# EAGLE board GPIO_Block-Panel-v10 (EAGLE 6.6.0), part 1 of 3
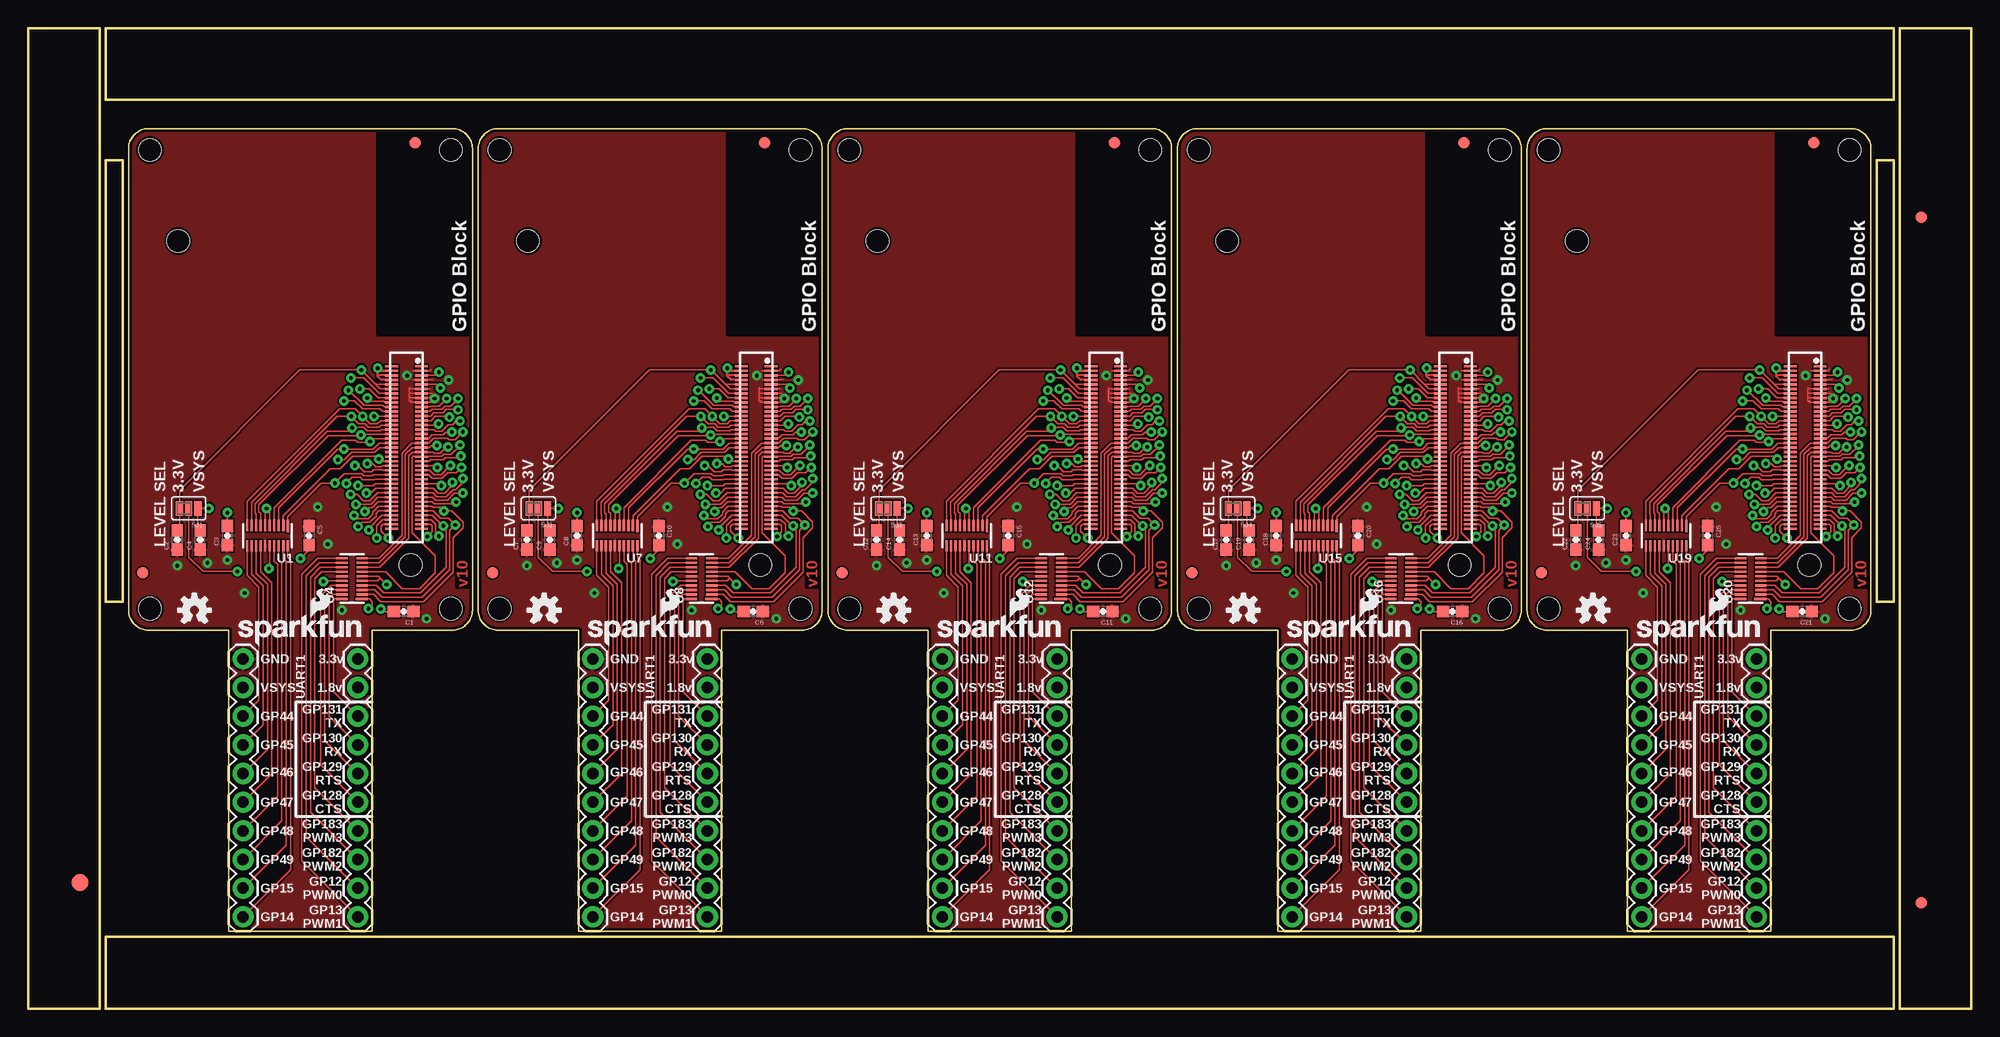
[diagram p0: board, top side]
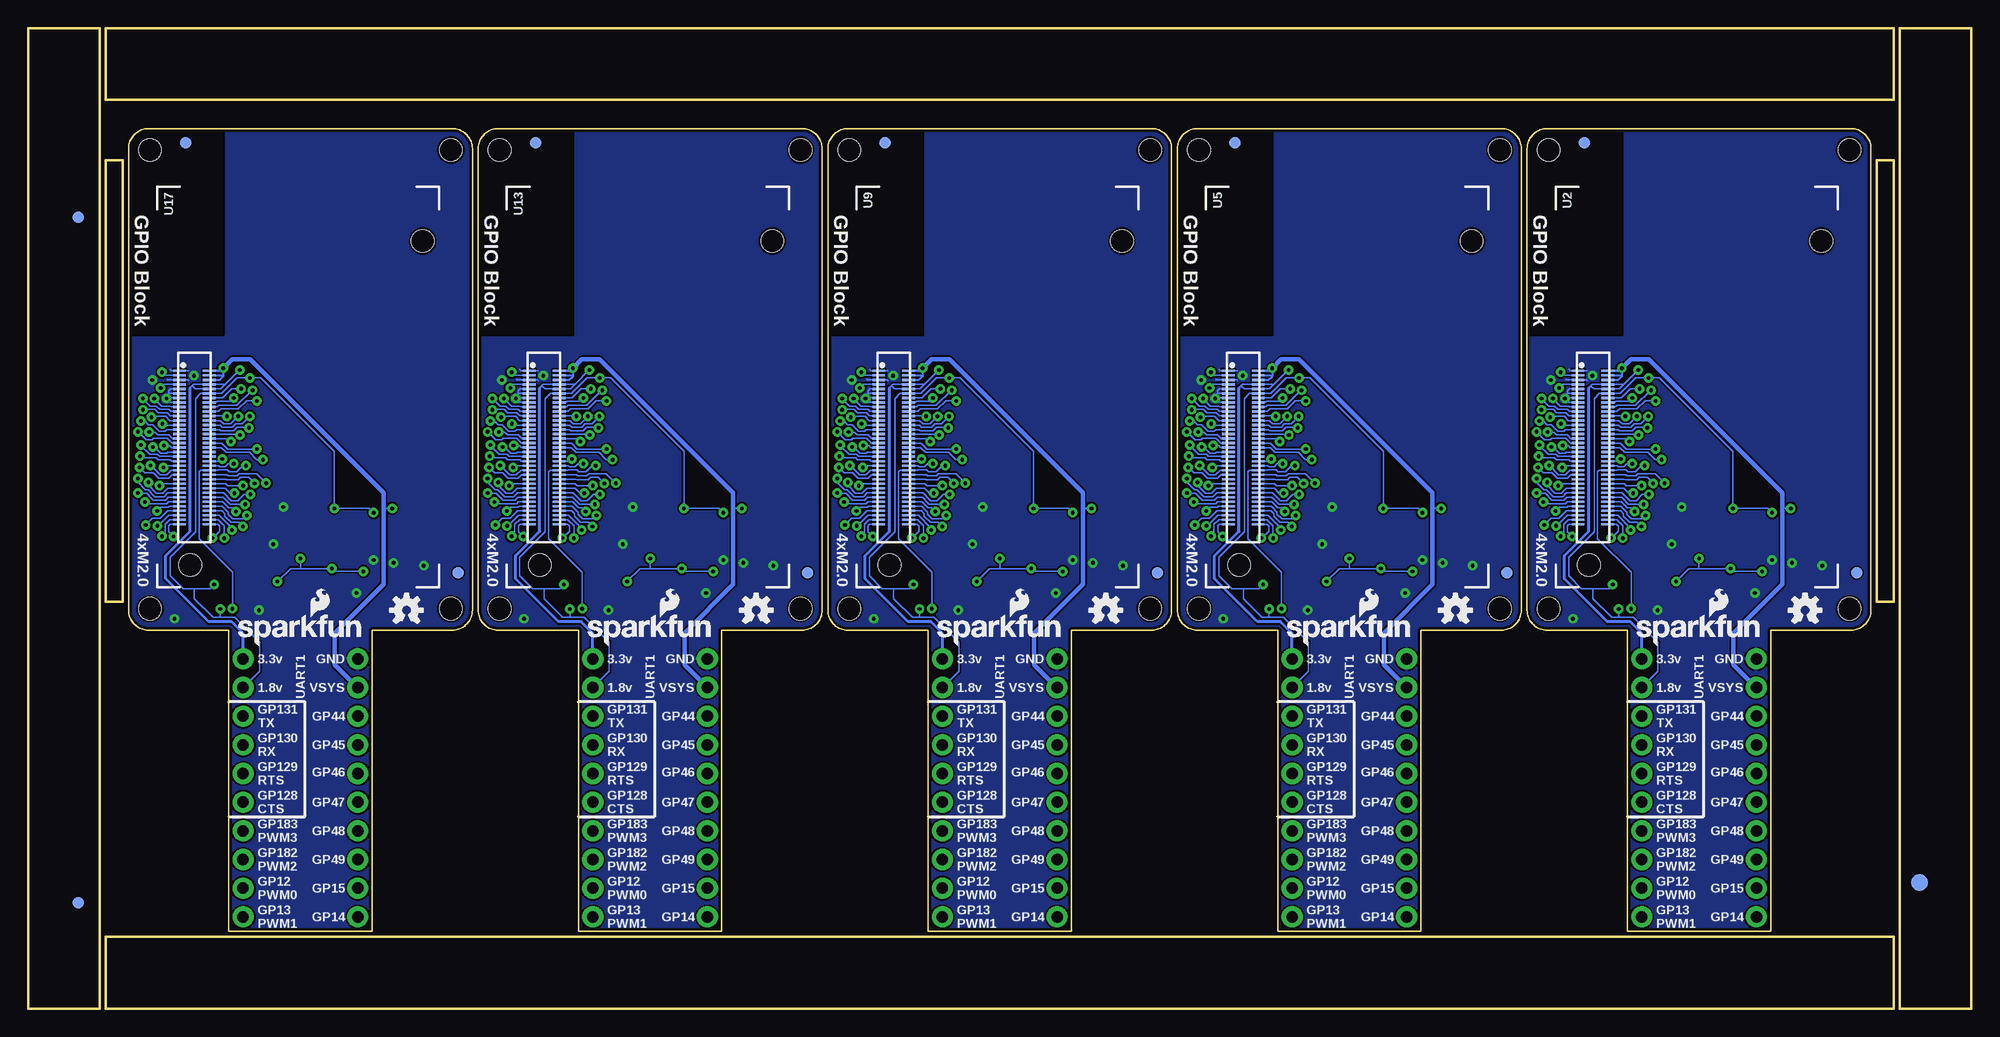
[diagram p1: board, bottom side, seen from below]

Size 172.21 x 86.87 mm. Coordinates in mm from the lower left corner, seen from the top.
Outline: 6.35,79.25 6.35,0 0,0 0,29.72
Outline: 172.21,75.44 172.21,0 165.86,0 165.86,25.91
Outline: 165.86,5.33 165.86,86.87 172.21,86.87 172.21,54.86
Outline: 0,14.48 0,86.87 6.35,86.87 6.35,64.01
Outline: 39.37,76.2 39.37,35.31 arc-90 37.59,33.53 30.48,33.53 30.48,6.86 17.78,6.86 17.78,33.53 10.67,33.53 arc-90 8.89,35.31 8.89,76.2 arc-90 10.67,77.98 37.59,77.98 arc-90 39.37,76.2
Outline: 70.36,76.2 70.36,35.31 arc-90 68.58,33.53 61.47,33.53 61.47,6.86 48.77,6.86 48.77,33.53 41.66,33.53 arc-90 39.88,35.31 39.88,76.2 arc-90 41.66,77.98 68.58,77.98 arc-90 70.36,76.2
Outline: 101.35,76.2 101.35,35.31 arc-90 99.57,33.53 92.46,33.53 92.46,6.86 79.76,6.86 79.76,33.53 72.64,33.53 arc-90 70.87,35.31 70.87,76.2 arc-90 72.64,77.98 99.57,77.98 arc-90 101.35,76.2
Outline: 132.33,76.2 132.33,35.31 arc-90 130.56,33.53 123.44,33.53 123.44,6.86 110.74,6.86 110.74,33.53 103.63,33.53 arc-90 101.85,35.31 101.85,76.2 arc-90 103.63,77.98 130.56,77.98 arc-90 132.33,76.2
Outline: 163.32,76.2 163.32,35.31 arc-90 161.54,33.53 154.43,33.53 154.43,6.86 141.73,6.86 141.73,33.53 134.62,33.53 arc-90 132.84,35.31 132.84,76.2 arc-90 134.62,77.98 161.54,77.98 arc-90 163.32,76.2
Outline: 6.86,6.35 6.86,0 165.35,0 165.35,6.35 6.86,6.35
Outline: 6.86,80.52 165.35,80.52 165.35,86.87 6.86,86.87 6.86,80.52
Outline: 6.86,36.07 6.86,75.18 8.38,75.18 8.38,36.07 6.86,36.07
Outline: 163.83,36.07 163.83,75.18 165.35,75.18 165.35,36.07 163.83,36.07
Copper layers (1*16): Top 0.035mm / dielectric 1.5mm / Bottom 0.035mm
Design rules "SparkFun-2-layer *": minimum track width 6mil, minimum drill 13mil, track to track 6mil, track to pad 6mil, pad to pad 6mil, via to via 6mil, smd to smd 6mil, copper to edge 8mil, drill to drill 8mil, minimum pad ring 12mil, minimum via ring 10mil, stop-mask expansion 4mil, vias tented up to drill 20mil, thermal gap 6mil
Holes 2 mm at 37.47,35.43 10.79,35.43 10.79,76.07 37.47,76.07 68.45,35.43 41.78,35.43 41.78,76.07 68.45,76.07 99.44,35.43 72.77,35.43 72.77,76.07 99.44,76.07 130.43,35.43 103.76,35.43 103.76,76.07 130.43,76.07 161.42,35.43 134.75,35.43 134.75,76.07 161.42,76.07
tRestrict: area 31,59.7 to 39.4,78; area 62,59.7 to 70.4,78; area 93,59.7 to 101.3,78; area 124,59.7 to 132.3,78; area 154.9,59.7 to 163.3,78
bRestrict: area 31,59.7 to 39.4,78; area 62,59.7 to 70.4,78; area 93,59.7 to 101.3,78; area 124,59.7 to 132.3,78; area 154.9,59.7 to 163.3,78

## Footprints (pad centres in the part's own frame; a part is rotated, then mirrored left to right if it is on the bottom)
0603-CAP = smd 1.1 x 1: 1 -0.85,0; 2 0.85,0
FIDUCIAL-1.5X3 = smd 1.5 x 1.5: 1 0,0
FIDUCIAL-1X2 = smd 1 x 1: 1 0,0
1X10 = drill 1.016 pad 1.88: 1 0,0; 2 2.54,0; 3 5.08,0; 4 7.62,0; 5 10.16,0; 6 12.7,0; 7 15.24,0; 8 17.78,0; 9 20.32,0; 10 22.86,0
PAD-JUMPER-3-2OF3_NC_BY_PASTE_YES_SILK_FULL_BOX = smd 0.635 x 1.27: 1 -0.813,0; 2 0,0; 3 0.813,0
UFDFN-20 = smd 0.2 x 1.1: 1 -1.8,-0.85 | smd 0.2 x 1: 2 -1.4,-0.9; 3 -1,-0.9; 4 -0.6,-0.9; 5 -0.2,-0.9; 6 0.2,-0.9; 7 0.6,-0.9; 8 1,-0.9; 9 1.4,-0.9; 10 1.8,-0.9; 11 1.8,0.9; 12 1.4,0.9; 13 1,0.9; 14 0.6,0.9; 15 0.2,0.9; 16 -0.2,0.9; 17 -0.6,0.9; 18 -1,0.9; 19 -1.4,0.9; 20 -1.8,0.9
EDISON_DAUGHTER = smd 1.14 x 0.2: 1 1.98,19.17; 2 4.62,19.17; 3 1.98,18.77; 4 4.62,18.77; 5 1.98,18.37; 6 4.62,18.37; 7 1.98,17.97; 8 4.62,17.97; 9 1.98,17.57; 10 4.62,17.57; 11 1.98,17.17; 12 4.62,17.17; 13 1.98,16.77; 14 4.62,16.77; 15 1.98,16.37; 16 4.62,16.37; 17 1.98,15.97; 18 4.62,15.97; 19 1.98,15.57; 20 4.62,15.57; 21 1.98,15.17; 22 4.62,15.17; 23 1.98,14.77; 24 4.62,14.77; 25 1.98,14.37; 26 4.62,14.37; 27 1.98,13.97; 28 4.62,13.97; 29 1.98,13.57; 30 4.62,13.57; 31 1.98,13.17; 32 4.62,13.17; 33 1.98,12.77; 34 4.62,12.77; 35 1.98,12.37; 36 4.62,12.37; 37 1.98,11.97; 38 4.62,11.97; 39 1.98,11.57; 40 4.62,11.57; 41 1.98,11.17; 42 4.62,11.17; 43 1.98,10.77; 44 4.62,10.77; 45 1.98,10.37; 46 4.62,10.37; 47 1.98,9.97; 48 4.62,9.97; 49 1.98,9.57; 50 4.62,9.57; 51 1.98,9.17; 52 4.62,9.17; 53 1.98,8.77; 54 4.62,8.77; 55 1.98,8.37; 56 4.62,8.37; 57 1.98,7.97; 58 4.62,7.97; 59 1.98,7.57; 60 4.62,7.57; 61 1.98,7.17; 62 4.62,7.17; 63 1.98,6.77; 64 4.62,6.77; 65 1.98,6.37; 66 4.62,6.37; 67 1.98,5.97; 68 4.62,5.97; 69 1.98,5.57; 70 4.62,5.57 | hole 2: 23.53,30.67; 2.93,1.98
DF40C-70DP-0.4(51) = smd 0.2 x 1.14 bottom: 1 6.8,1.32; 2 6.8,-1.32; 3 6.4,1.32; 4 6.4,-1.32; 5 6,1.32; 6 6,-1.32; 7 5.6,1.32; 8 5.6,-1.32; 9 5.2,1.32; 10 5.2,-1.32; 11 4.8,1.32; 12 4.8,-1.32; 13 4.4,1.32; 14 4.4,-1.32; 15 4,1.32; 16 4,-1.32; 17 3.6,1.32; 18 3.6,-1.32; 19 3.2,1.32; 20 3.2,-1.32; 21 2.8,1.32; 22 2.8,-1.32; 23 2.4,1.32; 24 2.4,-1.32; 25 2,1.32; 26 2,-1.32; 27 1.6,1.32; 28 1.6,-1.32; 29 1.2,1.32; 30 1.2,-1.32; 31 0.8,1.32; 32 0.8,-1.32; 33 0.4,1.32; 34 0.4,-1.32; 35 0,1.32; 36 0,-1.32; 37 -0.4,1.32; 38 -0.4,-1.32; 39 -0.8,1.32; 40 -0.8,-1.32; 41 -1.2,1.32; 42 -1.2,-1.32; 43 -1.6,1.32; 44 -1.6,-1.32; 45 -2,1.32; 46 -2,-1.32; 47 -2.4,1.32; 48 -2.4,-1.32; 49 -2.8,1.32; 50 -2.8,-1.32; 51 -3.2,1.32; 52 -3.2,-1.32; 53 -3.6,1.32; 54 -3.6,-1.32; 55 -4,1.32; 56 -4,-1.32; 57 -4.4,1.32; 58 -4.4,-1.32; 59 -4.8,1.32; 60 -4.8,-1.32; 61 -5.2,1.32; 62 -5.2,-1.32; 63 -5.6,1.32; 64 -5.6,-1.32; 65 -6,1.32; 66 -6,-1.32; 67 -6.4,1.32; 68 -6.4,-1.32; 69 -6.8,1.32; 70 -6.8,-1.32; NC1 7.2,1.32; NC2 7.2,-1.32; NC3 -7.2,-1.32; NC4 -7.2,1.32

## Placement (x,y rotation side)
C1  0.1uF  [0603-CAP]  33.27,35.18 180 top
C2  0.1uF  [0603-CAP]  13.21,41.53 90 top
C3  0.1uF  [0603-CAP]  17.65,41.91 90 top
C4  0.1uF  [0603-CAP]  15.24,41.53 90 top
C5  0.1uF  [0603-CAP]  24.89,41.91 270 top
C6  0.1uF  [0603-CAP]  64.26,35.18 180 top
C7  0.1uF  [0603-CAP]  44.2,41.53 90 top
C8  0.1uF  [0603-CAP]  48.64,41.91 90 top
C9  0.1uF  [0603-CAP]  46.23,41.53 90 top
C10  0.1uF  [0603-CAP]  55.88,41.91 270 top
C11  0.1uF  [0603-CAP]  95.25,35.18 180 top
C12  0.1uF  [0603-CAP]  75.18,41.53 90 top
C13  0.1uF  [0603-CAP]  79.63,41.91 90 top
C14  0.1uF  [0603-CAP]  77.22,41.53 90 top
C15  0.1uF  [0603-CAP]  86.87,41.91 270 top
C16  0.1uF  [0603-CAP]  126.24,35.18 180 top
C17  0.1uF  [0603-CAP]  106.17,41.53 90 top
C18  0.1uF  [0603-CAP]  110.62,41.91 90 top
C19  0.1uF  [0603-CAP]  108.2,41.53 90 top
C20  0.1uF  [0603-CAP]  117.86,41.91 270 top
C21  0.1uF  [0603-CAP]  157.23,35.18 180 top
C22  0.1uF  [0603-CAP]  137.16,41.53 90 top
C23  0.1uF  [0603-CAP]  141.6,41.91 90 top
C24  0.1uF  [0603-CAP]  139.19,41.53 90 top
C25  0.1uF  [0603-CAP]  148.84,41.91 270 top
E$1  [FIDUCIAL-1.5X3]  4.57,11.18 0 top
E$2  [FIDUCIAL-1.5X3]  4.57,11.18 0 bottom
E$3  [FIDUCIAL-1X2]  167.77,70.1 180 bottom
E$4  [FIDUCIAL-1X2]  167.77,9.4 0 top
E$5  [FIDUCIAL-1X2]  167.77,70.1 180 top
E$6  [FIDUCIAL-1X2]  167.77,9.4 0 bottom
FID1  FIDUCIAL1X2  [FIDUCIAL-1X2]  10.16,38.61 0 top
FID2  FIDUCIAL1X2  [FIDUCIAL-1X2]  34.29,76.71 0 top
FID3  FIDUCIAL1X2  [FIDUCIAL-1X2]  10.16,38.61 0 bottom
FID4  FIDUCIAL1X2  [FIDUCIAL-1X2]  34.29,76.71 0 bottom
FID5  FIDUCIAL1X2  [FIDUCIAL-1X2]  41.15,38.61 0 top
FID6  FIDUCIAL1X2  [FIDUCIAL-1X2]  65.28,76.71 0 top
FID7  FIDUCIAL1X2  [FIDUCIAL-1X2]  41.15,38.61 0 bottom
FID8  FIDUCIAL1X2  [FIDUCIAL-1X2]  65.28,76.71 0 bottom
FID9  FIDUCIAL1X2  [FIDUCIAL-1X2]  72.14,38.61 0 top
FID10  FIDUCIAL1X2  [FIDUCIAL-1X2]  96.27,76.71 0 top
FID11  FIDUCIAL1X2  [FIDUCIAL-1X2]  72.14,38.61 0 bottom
FID12  FIDUCIAL1X2  [FIDUCIAL-1X2]  96.27,76.71 0 bottom
FID13  FIDUCIAL1X2  [FIDUCIAL-1X2]  103.12,38.61 0 top
FID14  FIDUCIAL1X2  [FIDUCIAL-1X2]  127.25,76.71 0 top
FID15  FIDUCIAL1X2  [FIDUCIAL-1X2]  103.12,38.61 0 bottom
FID16  FIDUCIAL1X2  [FIDUCIAL-1X2]  127.25,76.71 0 bottom
FID17  FIDUCIAL1X2  [FIDUCIAL-1X2]  134.11,38.61 0 top
FID18  FIDUCIAL1X2  [FIDUCIAL-1X2]  158.24,76.71 0 top
FID19  FIDUCIAL1X2  [FIDUCIAL-1X2]  134.11,38.61 0 bottom
FID20  FIDUCIAL1X2  [FIDUCIAL-1X2]  158.24,76.71 0 bottom
JP1  M10"  [1X10]  29.21,8.13 90 top
JP2  M10"  [1X10]  19.05,8.13 90 top
JP3  M10"  [1X10]  60.2,8.13 90 top
JP4  M10"  [1X10]  50.04,8.13 90 top
JP5  M10"  [1X10]  91.19,8.13 90 top
JP6  M10"  [1X10]  81.03,8.13 90 top
JP7  M10"  [1X10]  122.17,8.13 90 top
JP8  M10"  [1X10]  112.01,8.13 90 top
JP9  M10"  [1X10]  153.16,8.13 90 top
JP10  M10"  [1X10]  143,8.13 90 top
LOGO1  OSHW-LOGOS  [OSHW-LOGO-S]  14.73,35.31 0 top
LOGO2  OSHW-LOGOS  [OSHW-LOGO-S]  14.73,35.31 0 bottom
LOGO3  SFE_LOGO_NAME_FLAME.1_INCH  [SFE_LOGO_NAME_FLAME_.1]  30.1,32 0 bottom
LOGO4  SFE_LOGO_NAME_FLAME.1_INCH  [SFE_LOGO_NAME_FLAME_.1]  18.19,32 0 top
LOGO5  OSHW-LOGOS  [OSHW-LOGO-S]  45.72,35.31 0 bottom
LOGO6  SFE_LOGO_NAME_FLAME.1_INCH  [SFE_LOGO_NAME_FLAME_.1]  61.09,32 0 bottom
LOGO7  OSHW-LOGOS  [OSHW-LOGO-S]  45.72,35.31 0 top
LOGO8  SFE_LOGO_NAME_FLAME.1_INCH  [SFE_LOGO_NAME_FLAME_.1]  49.17,32 0 top
LOGO9  OSHW-LOGOS  [OSHW-LOGO-S]  76.71,35.31 0 bottom
LOGO10  SFE_LOGO_NAME_FLAME.1_INCH  [SFE_LOGO_NAME_FLAME_.1]  92.08,32 0 bottom
LOGO11  OSHW-LOGOS  [OSHW-LOGO-S]  76.71,35.31 0 top
LOGO12  SFE_LOGO_NAME_FLAME.1_INCH  [SFE_LOGO_NAME_FLAME_.1]  80.16,32 0 top
LOGO13  OSHW-LOGOS  [OSHW-LOGO-S]  107.7,35.31 0 bottom
LOGO14  SFE_LOGO_NAME_FLAME.1_INCH  [SFE_LOGO_NAME_FLAME_.1]  123.06,32 0 bottom
LOGO15  OSHW-LOGOS  [OSHW-LOGO-S]  107.7,35.31 0 top
LOGO16  SFE_LOGO_NAME_FLAME.1_INCH  [SFE_LOGO_NAME_FLAME_.1]  111.15,32 0 top
LOGO17  OSHW-LOGOS  [OSHW-LOGO-S]  138.68,35.31 0 bottom
LOGO18  SFE_LOGO_NAME_FLAME.1_INCH  [SFE_LOGO_NAME_FLAME_.1]  154.05,32 0 bottom
LOGO19  OSHW-LOGOS  [OSHW-LOGO-S]  138.68,35.31 0 top
LOGO20  SFE_LOGO_NAME_FLAME.1_INCH  [SFE_LOGO_NAME_FLAME_.1]  142.14,32 0 top
SJ1  GPIO Reference Select  [PAD-JUMPER-3-2OF3_NC_BY_PASTE_YES_SILK_FULL_BOX]  14.22,44.32 180 top
SJ2  GPIO Reference Select  [PAD-JUMPER-3-2OF3_NC_BY_PASTE_YES_SILK_FULL_BOX]  45.21,44.32 180 top
SJ3  GPIO Reference Select  [PAD-JUMPER-3-2OF3_NC_BY_PASTE_YES_SILK_FULL_BOX]  76.2,44.32 180 top
SJ4  GPIO Reference Select  [PAD-JUMPER-3-2OF3_NC_BY_PASTE_YES_SILK_FULL_BOX]  107.19,44.32 180 top
SJ5  GPIO Reference Select  [PAD-JUMPER-3-2OF3_NC_BY_PASTE_YES_SILK_FULL_BOX]  138.18,44.32 180 top
U1  TXB0108  [UFDFN-20]  21.21,41.91 180 top
U2  EDISON_CONNECTOR_FULLMOUNTING_HOLES  [EDISON_DAUGHTER]  36.83,37.34 0 bottom
U3  EDISON_CONNECTOR_FULLHEADER  [DF40C-70DP-0.4(51)]  33.53,49.71 90 bottom
U4  TXB0108  [UFDFN-20]  28.7,38.1 90 top
U5  EDISON_CONNECTOR_FULLMOUNTING_HOLES  [EDISON_DAUGHTER]  67.82,37.34 0 bottom
U6  EDISON_CONNECTOR_FULLHEADER  [DF40C-70DP-0.4(51)]  64.52,49.71 90 bottom
U7  TXB0108  [UFDFN-20]  52.2,41.91 180 top
U8  TXB0108  [UFDFN-20]  59.69,38.1 90 top
U9  EDISON_CONNECTOR_FULLMOUNTING_HOLES  [EDISON_DAUGHTER]  98.81,37.34 0 bottom
U10  EDISON_CONNECTOR_FULLHEADER  [DF40C-70DP-0.4(51)]  95.51,49.71 90 bottom
U11  TXB0108  [UFDFN-20]  83.19,41.91 180 top
U12  TXB0108  [UFDFN-20]  90.68,38.1 90 top
U13  EDISON_CONNECTOR_FULLMOUNTING_HOLES  [EDISON_DAUGHTER]  129.79,37.34 0 bottom
U14  EDISON_CONNECTOR_FULLHEADER  [DF40C-70DP-0.4(51)]  126.49,49.71 90 bottom
U15  TXB0108  [UFDFN-20]  114.17,41.91 180 top
U16  TXB0108  [UFDFN-20]  121.67,38.1 90 top
U17  EDISON_CONNECTOR_FULLMOUNTING_HOLES  [EDISON_DAUGHTER]  160.78,37.34 0 bottom
U18  EDISON_CONNECTOR_FULLHEADER  [DF40C-70DP-0.4(51)]  157.48,49.71 90 bottom
U19  TXB0108  [UFDFN-20]  145.16,41.91 180 top
U20  TXB0108  [UFDFN-20]  152.65,38.1 90 top

## Library data of the parts
C1-C25 = SparkFun-Capacitors; PROD_ID: CAP-00810
E$1 E$2 = SparkFun-Retired
E$3-E$6 FID1-FID20 LOGO1-LOGO20 = SparkFun-Aesthetics
JP1-JP10 = SparkFun-Connectors
SJ1-SJ5 = SparkFun-Passives
U1 U4 U7 U8 U11 U12 U15 U16 U19 U20 = Testing; PROD_ID: IC-12292
U2 U3 U5 U6 U9 U10 U13 U14 U17 U18 = Edison

## Nets
1.8V: C1.2 C3.2 JP1.9 U1.5 U1.6 U2.12 U3.12 U4.5 U4.6
1.8V1: C6.2 C8.2 JP3.9 U5.12 U6.12 U7.5 U7.6 U8.5 U8.6
1.8V2: C11.2 C13.2 JP5.9 U9.12 U10.12 U11.5 U11.6 U12.5 U12.6
1.8V3: C16.2 C18.2 JP7.9 U13.12 U14.12 U15.5 U15.6 U16.5 U16.6
1.8V4: C21.2 C23.2 JP9.9 U17.12 U18.12 U19.5 U19.6 U20.5 U20.6
3.3V: C2.2 JP1.10 SJ1.3 U2.8 U2.10 U3.8 U3.10
3.3V1: C7.2 JP3.10 SJ2.3 U5.8 U5.10 U6.8 U6.10
3.3V2: C12.2 JP5.10 SJ3.3 U9.8 U9.10 U10.8 U10.10
3.3V3: C17.2 JP7.10 SJ4.3 U13.8 U13.10 U14.8 U14.10
3.3V4: C22.2 JP9.10 SJ5.3 U17.8 U17.10 U18.8 U18.10
DCIN: U2.14 U3.14
DCIN1: U5.14 U6.14
DCIN2: U9.14 U10.14
DCIN3: U13.14 U14.14
DCIN4: U17.14 U18.14
FAULT: U2.19 U3.19
FAULT1: U5.19 U6.19
FAULT2: U9.19 U10.19
FAULT3: U13.19 U14.19
FAULT4: U17.19 U18.19
FW_RCVR: U2.69 U3.69
FW_RCVR1: U5.69 U6.69
FW_RCVR2: U9.69 U10.69
FW_RCVR3: U13.69 U14.69
FW_RCVR4: U17.69 U18.69
GND: C1.1 C2.1 C3.1 C4.1 C5.1 JP2.10 U1.15 U2.1 U2.5 U2.9 U2.11 U2.13 U2.15 U3.1 U3.5 U3.9 U3.11 U3.13 U3.15 U4.15
GND1: C6.1 C7.1 C8.1 C9.1 C10.1 JP4.10 U5.1 U5.5 U5.9 U5.11 U5.13 U5.15 U6.1 U6.5 U6.9 U6.11 U6.13 U6.15 U7.15 U8.15
GND2: C11.1 C12.1 C13.1 C14.1 C15.1 JP6.10 U9.1 U9.5 U9.9 U9.11 U9.13 U9.15 U10.1 U10.5 U10.9 U10.11 U10.13 U10.15 U11.15 U12.15
GND3: C16.1 C17.1 C18.1 C19.1 C20.1 JP8.10 U13.1 U13.5 U13.9 U13.11 U13.13 U13.15 U14.1 U14.5 U14.9 U14.11 U14.13 U14.15 U15.15 U16.15
GND4: C21.1 C22.1 C23.1 C24.1 C25.1 JP10.10 U17.1 U17.5 U17.9 U17.11 U17.13 U17.15 U18.1 U18.5 U18.9 U18.11 U18.13 U18.15 U19.15 U20.15
GP1: U5.48 U6.48 U7.1
GP2: U5.42 U6.42 U7.2
GP3: U5.34 U6.34 U7.3
GP4: U5.32 U6.32 U7.4
GP5: U5.30 U6.30 U7.7
GP6: U5.28 U6.28 U7.8
GP7: U5.26 U6.26 U7.9
GP8: U5.25 U6.25
GP9: U5.24 U6.24 U7.10
GP10: U9.48 U10.48 U11.1
GP11: U9.42 U10.42 U11.2
GP12: U9.34 U10.34 U11.3
GP12_PWM0: U2.35 U3.35 U4.9
GP12_PWM1: U5.35 U6.35 U8.9
GP12_PWM2: U9.35 U10.35 U12.9
GP12_PWM3: U13.35 U14.35 U16.9
GP12_PWM4: U17.35 U18.35 U20.9
GP13: U9.32 U10.32 U11.4
GP13_PWM1: U2.33 U3.33 U4.10
GP13_PWM2: U5.33 U6.33 U8.10
GP13_PWM3: U9.33 U10.33 U12.10
GP13_PWM4: U13.33 U14.33 U16.10
GP13_PWM5: U17.33 U18.33 U20.10
GP14: U1.1 U2.48 U3.48
GP15: U1.2 U2.42 U3.42
GP16: U9.30 U10.30 U11.7
GP17: U9.28 U10.28 U11.8
GP18: U9.26 U10.26 U11.9
GP19: U9.25 U10.25
GP19_I2C_1_SCL: U2.41 U3.41
GP19_I2C_1_SCL1: U5.41 U6.41
GP19_I2C_1_SCL2: U9.41 U10.41
GP19_I2C_1_SCL3: U13.41 U14.41
GP19_I2C_1_SCL4: U17.41 U18.41
GP20: U9.24 U10.24 U11.10
GP20_I2C_1_SDA: U2.43 U3.43
GP20_I2C_1_SDA1: U5.43 U6.43
GP20_I2C_1_SDA2: U9.43 U10.43
GP20_I2C_1_SDA3: U13.43 U14.43
GP20_I2C_1_SDA4: U17.43 U18.43
GP21: U13.48 U14.48 U15.1
GP22: U13.42 U14.42 U15.2
GP23: U13.34 U14.34 U15.3
GP24: U13.32 U14.32 U15.4
GP25: U13.30 U14.30 U15.7
GP26: U13.28 U14.28 U15.8
GP27: U13.26 U14.26 U15.9
GP27_I2C_6_SCL: U2.45 U3.45
GP27_I2C_6_SCL1: U5.45 U6.45
GP27_I2C_6_SCL2: U9.45 U10.45
GP27_I2C_6_SCL3: U13.45 U14.45
GP27_I2C_6_SCL4: U17.45 U18.45
GP28: U13.25 U14.25
GP28_I2C_6_SDA: U2.47 U3.47
GP28_I2C_6_SDA1: U5.47 U6.47
GP28_I2C_6_SDA2: U9.47 U10.47
GP28_I2C_6_SDA3: U13.47 U14.47
GP28_I2C_6_SDA4: U17.47 U18.47
GP29: U13.24 U14.24 U15.10
GP30: U17.48 U18.48 U19.1
GP31: U17.42 U18.42 U19.2
GP32: U17.34 U18.34 U19.3
GP33: U17.32 U18.32 U19.4
GP34: U17.30 U18.30 U19.7
GP35: U17.28 U18.28 U19.8
GP36: U17.26 U18.26 U19.9
GP37: U17.25 U18.25
GP38: U17.24 U18.24 U19.10
GP40_I2S_2_CLK: U2.52 U3.52
GP40_I2S_2_CLK1: U5.52 U6.52
GP40_I2S_2_CLK2: U9.52 U10.52
GP40_I2S_2_CLK3: U13.52 U14.52
GP40_I2S_2_CLK4: U17.52 U18.52
GP41_I2S_2_FS: U2.54 U3.54
GP41_I2S_2_FS1: U5.54 U6.54
GP41_I2S_2_FS2: U9.54 U10.54
GP41_I2S_2_FS3: U13.54 U14.54
GP41_I2S_2_FS4: U17.54 U18.54
GP42_I2S_2_RXD: U2.50 U3.50
GP42_I2S_2_RXD1: U5.50 U6.50
GP42_I2S_2_RXD2: U9.50 U10.50
GP42_I2S_2_RXD3: U13.50 U14.50
GP42_I2S_2_RXD4: U17.50 U18.50
GP43_I2S_2_TXD: U2.56 U3.56
GP43_I2S_2_TXD1: U5.56 U6.56
GP43_I2S_2_TXD2: U9.56 U10.56
GP43_I2S_2_TXD3: U13.56 U14.56
GP43_I2S_2_TXD4: U17.56 U18.56
GP44: U1.10 U2.24 U3.24
GP45: U1.9 U2.26 U3.26
GP46: U1.8 U2.28 U3.28
GP47: U1.7 U2.30 U3.30
GP48: U1.4 U2.32 U3.32
GP49: U1.3 U2.34 U3.34
GP77_SD_0_CD#: U2.60 U3.60
GP77_SD_0_CD#1: U5.60 U6.60
GP77_SD_0_CD#2: U9.60 U10.60
GP77_SD_0_CD#3: U13.60 U14.60
GP77_SD_0_CD#4: U17.60 U18.60
GP78_SD_0_CLK: U2.58 U3.58
GP78_SD_0_CLK1: U5.58 U6.58
GP78_SD_0_CLK2: U9.58 U10.58
GP78_SD_0_CLK3: U13.58 U14.58
GP78_SD_0_CLK4: U17.58 U18.58
GP79_SD_0_CMD: U2.62 U3.62
GP79_SD_0_CMD1: U5.62 U6.62
GP79_SD_0_CMD2: U9.62 U10.62
GP79_SD_0_CMD3: U13.62 U14.62
GP79_SD_0_CMD4: U17.62 U18.62
GP80_SD_0_DAT0: U2.66 U3.66
GP80_SD_0_DAT1: U5.66 U6.66
GP80_SD_0_DAT2: U9.66 U10.66
GP80_SD_0_DAT3: U13.66 U14.66
GP80_SD_0_DAT4: U17.66 U18.66
GP81_SD_0_DAT1: U2.70 U3.70
GP81_SD_0_DAT2: U5.70 U6.70
GP81_SD_0_DAT3: U9.70 U10.70
GP81_SD_0_DAT4: U13.70 U14.70
GP81_SD_0_DAT5: U17.70 U18.70
GP82_SD_0_DAT1: U5.64 U6.64
GP82_SD_0_DAT2: U2.64 U3.64
GP82_SD_0_DAT3: U9.64 U10.64
GP82_SD_0_DAT4: U13.64 U14.64
GP82_SD_0_DAT5: U17.64 U18.64
GP83_SD_0_DAT1: U5.68 U6.68
GP83_SD_0_DAT2: U9.68 U10.68
GP83_SD_0_DAT3: U2.68 U3.68
GP83_SD_0_DAT4: U13.68 U14.68
GP83_SD_0_DAT5: U17.68 U18.68
GP84_SD_CLK_FB: U2.44 U3.44
GP84_SD_CLK_FB1: U5.44 U6.44
GP84_SD_CLK_FB2: U9.44 U10.44
GP84_SD_CLK_FB3: U13.44 U14.44
GP84_SD_CLK_FB4: U17.44 U18.44
GP109_SPI_2_CLK: U2.55 U3.55
GP109_SPI_2_CLK1: U5.55 U6.55
GP109_SPI_2_CLK2: U9.55 U10.55
GP109_SPI_2_CLK3: U13.55 U14.55
GP109_SPI_2_CLK4: U17.55 U18.55
GP110_SPI_2_FS0: U2.53 U3.53
GP110_SPI_2_FS1: U5.53 U6.53
GP110_SPI_2_FS2: U9.53 U10.53
GP110_SPI_2_FS3: U13.53 U14.53
GP110_SPI_2_FS4: U17.53 U18.53
GP111_SPI_2_FS1: U2.51 U3.51
GP111_SPI_2_FS2: U5.51 U6.51
GP111_SPI_2_FS3: U9.51 U10.51
GP111_SPI_2_FS4: U13.51 U14.51
GP111_SPI_2_FS5: U17.51 U18.51
GP114_SPI_2_RXD: U2.59 U3.59
GP114_SPI_2_RXD1: U5.59 U6.59
GP114_SPI_2_RXD2: U9.59 U10.59
GP114_SPI_2_RXD3: U13.59 U14.59
GP114_SPI_2_RXD4: U17.59 U18.59
GP115_SPI_2_TXD: U2.57 U3.57
GP115_SPI_2_TXD1: U5.57 U6.57
GP115_SPI_2_TXD2: U9.57 U10.57
GP115_SPI_2_TXD3: U13.57 U14.57
GP115_SPI_2_TXD4: U17.57 U18.57
GP128_UART_1_CTS: U2.65 U3.65 U4.4
GP128_UART_1_CTS1: U5.65 U6.65 U8.4
GP128_UART_1_CTS2: U9.65 U10.65 U12.4
GP128_UART_1_CTS3: U13.65 U14.65 U16.4
GP128_UART_1_CTS4: U17.65 U18.65 U20.4
GP129_UART_1_RTS: U2.63 U3.63 U4.3
GP129_UART_1_RTS1: U5.63 U6.63 U8.3
GP129_UART_1_RTS2: U9.63 U10.63 U12.3
GP129_UART_1_RTS3: U13.63 U14.63 U16.3
GP129_UART_1_RTS4: U17.63 U18.63 U20.3
GP130_UART_1_RX: U2.61 U3.61 U4.2
GP130_UART_1_RX1: U5.61 U6.61 U8.2
GP130_UART_1_RX2: U9.61 U10.61 U12.2
GP130_UART_1_RX3: U13.61 U14.61 U16.2
GP130_UART_1_RX4: U17.61 U18.61 U20.2
GP131_UART_1_TX: U2.46 U3.46 U4.1
GP131_UART_1_TX1: U5.46 U6.46 U8.1
GP131_UART_1_TX2: U9.46 U10.46 U12.1
GP131_UART_1_TX3: U13.46 U14.46 U16.1
GP131_UART_1_TX4: U17.46 U18.46 U20.1
GP134_UART_2_RX: U2.22 U3.22
GP134_UART_2_RX1: U5.22 U6.22
GP134_UART_2_RX2: U9.22 U10.22
GP134_UART_2_RX3: U13.22 U14.22
GP134_UART_2_RX4: U17.22 U18.22
GP135_UART_2_TX: U2.27 U3.27
GP135_UART_2_TX1: U5.27 U6.27
GP135_UART_2_TX2: U9.27 U10.27
GP135_UART_2_TX3: U13.27 U14.27
GP135_UART_2_TX4: U17.27 U18.27
GP165: U2.25 U3.25
GP182_PWM1: U5.37 U6.37 U8.8
GP182_PWM2: U2.37 U3.37 U4.8
GP182_PWM3: U9.37 U10.37 U12.8
GP182_PWM4: U13.37 U14.37 U16.8
GP182_PWM5: U17.37 U18.37 U20.8
GP183_PWM1: U5.39 U6.39 U8.7
GP183_PWM2: U9.39 U10.39 U12.7
GP183_PWM3: U2.39 U3.39 U4.7
GP183_PWM4: U13.39 U14.39 U16.7
GP183_PWM5: U17.39 U18.39 U20.7
GPIO_REFERENCE_SELECT: C5.2 SJ1.2 U1.16 U4.16
GPIO_REFERENCE_SELECT1: C10.2 SJ2.2 U7.16 U8.16
GPIO_REFERENCE_SELECT2: C15.2 SJ3.2 U11.16 U12.16
GPIO_REFERENCE_SELECT3: C20.2 SJ4.2 U15.16 U16.16
GPIO_REFERENCE_SELECT4: C25.2 SJ5.2 U19.16 U20.16
MSIC_SLP_CLK: U2.7 U3.7
MSIC_SLP_CLK1: U5.7 U6.7
MSIC_SLP_CLK2: U9.7 U10.7
MSIC_SLP_CLK3: U13.7 U14.7
MSIC_SLP_CLK4: U17.7 U18.7
N$1: JP2.8 U1.11
N$2: JP2.7 U1.12
N$3: JP2.6 U1.13
N$4: JP2.5 U1.14
N$5: JP2.4 U1.17
N$6: JP2.3 U1.18
N$7: JP2.2 U1.19
N$8: JP2.1 U1.20
N$9: JP4.8 U7.11
N$10: JP4.7 U7.12
N$11: JP1.4 U4.14
N$12: JP1.3 U4.13
N$13: JP1.2 U4.12
N$14: JP1.1 U4.11
N$15: JP1.5 U4.17
N$16: JP1.6 U4.18
N$17: JP1.7 U4.19
N$18: JP1.8 U4.20
N$19: JP4.6 U7.13
N$20: JP4.5 U7.14
N$21: JP4.4 U7.17
N$22: JP4.3 U7.18
N$23: JP4.2 U7.19
N$24: JP4.1 U7.20
N$25: JP3.5 U8.17
N$26: JP3.6 U8.18
N$27: JP3.7 U8.19
N$28: JP3.8 U8.20
N$29: JP3.4 U8.14
N$30: JP3.3 U8.13
N$31: JP3.2 U8.12
N$32: JP3.1 U8.11
N$33: JP6.8 U11.11
N$34: JP6.7 U11.12
N$35: JP6.6 U11.13
N$36: JP6.5 U11.14
N$37: JP6.4 U11.17
N$38: JP6.3 U11.18
N$39: JP6.2 U11.19
N$40: JP6.1 U11.20
N$41: JP5.5 U12.17
N$42: JP5.6 U12.18
N$43: JP5.7 U12.19
N$44: JP5.8 U12.20
N$45: JP5.4 U12.14
N$46: JP5.3 U12.13
N$47: JP5.2 U12.12
N$48: JP5.1 U12.11
N$49: JP8.8 U15.11
N$50: JP8.7 U15.12
N$51: JP8.6 U15.13
N$52: JP8.5 U15.14
N$53: JP8.4 U15.17
N$54: JP8.3 U15.18
N$55: JP8.2 U15.19
N$56: JP8.1 U15.20
N$57: JP7.5 U16.17
N$58: JP7.6 U16.18
N$59: JP7.7 U16.19
N$60: JP7.8 U16.20
N$61: JP7.4 U16.14
N$62: JP7.3 U16.13
N$63: JP7.2 U16.12
N$64: JP7.1 U16.11
N$65: JP10.8 U19.11
N$66: JP10.7 U19.12
N$67: JP10.6 U19.13
N$68: JP10.5 U19.14
N$69: JP10.4 U19.17
N$70: JP10.3 U19.18
N$71: JP10.2 U19.19
N$72: JP10.1 U19.20
N$73: JP9.5 U20.17
N$74: JP9.6 U20.18
N$75: JP9.7 U20.19
N$76: JP9.8 U20.20
N$77: JP9.4 U20.14
N$78: JP9.3 U20.13
N$79: JP9.2 U20.12
N$80: JP9.1 U20.11
OSC_CLK_OUT: U2.67 U3.67
OSC_CLK_OUT1: U5.67 U6.67
OSC_CLK_OUT2: U9.67 U10.67
OSC_CLK_OUT3: U13.67 U14.67
OSC_CLK_OUT4: U17.67 U18.67
PSW: U2.21 U3.21
PSW1: U5.21 U6.21
PSW2: U9.21 U10.21
PSW3: U13.21 U14.21
PSW4: U17.21 U18.21
PWRBTN#: U2.17 U3.17
PWRBTN#1: U5.17 U6.17
PWRBTN#2: U9.17 U10.17
PWRBTN#3: U13.17 U14.17
PWRBTN#4: U17.17 U18.17
RCVR_MODE: U2.31 U3.31
RCVR_MODE1: U5.31 U6.31
RCVR_MODE2: U9.31 U10.31
RCVR_MODE3: U13.31 U14.31
RCVR_MODE4: U17.31 U18.31
RESET_OUT#: U2.36 U3.36
RESET_OUT#1: U5.36 U6.36
RESET_OUT#2: U9.36 U10.36
RESET_OUT#3: U13.36 U14.36
RESET_OUT#4: U17.36 U18.36
USB_DN: U2.18 U3.18
USB_DN1: U5.18 U6.18
USB_DN2: U9.18 U10.18
USB_DN3: U13.18 U14.18
USB_DN4: U17.18 U18.18
USB_DP: U2.16 U3.16
USB_DP1: U5.16 U6.16
USB_DP2: U9.16 U10.16
USB_DP3: U13.16 U14.16
USB_DP4: U17.16 U18.16
USB_ID: U2.3 U3.3
USB_ID1: U5.3 U6.3
USB_ID2: U9.3 U10.3
USB_ID3: U13.3 U14.3
USB_ID4: U17.3 U18.3
USB_VBUS: U2.20 U3.20
USB_VBUS1: U5.20 U6.20
USB_VBUS2: U9.20 U10.20
USB_VBUS3: U13.20 U14.20
USB_VBUS4: U17.20 U18.20
V_BAT_BKUP: U2.23 U3.23
V_BAT_BKUP1: U5.23 U6.23
V_BAT_BKUP2: U9.23 U10.23
V_BAT_BKUP3: U13.23 U14.23
V_BAT_BKUP4: U17.23 U18.23
VSYS: C4.2 JP2.9 SJ1.1 U2.2 U2.4 U2.6 U3.2 U3.4 U3.6
VSYS1: C9.2 JP4.9 SJ2.1 U5.2 U5.4 U5.6 U6.2 U6.4 U6.6
VSYS2: C14.2 JP6.9 SJ3.1 U9.2 U9.4 U9.6 U10.2 U10.4 U10.6
VSYS3: C19.2 JP8.9 SJ4.1 U13.2 U13.4 U13.6 U14.2 U14.4 U14.6
VSYS4: C24.2 JP10.9 SJ5.1 U17.2 U17.4 U17.6 U18.2 U18.4 U18.6

## Tracks (layer width: path | path; a pad name or v marks a point on that pad's centre or on a via)
1.8V  (via drill 0.33)
  Top 0.152: v31.77,37.57 31.19,38.15 | U4.6 31.04,38.3 31.19,38.15 | U1.5 21.41,44.05 v21.13,44.32 21.01,44.2 U1.6 | C1.2 31.47,35.18 v31.24,35.41 | C3.2 v17.65,43.94 | v28.6,55.88 29.72,55.88 31.09,54.51 U3.12 | 31.19,38.15 31.19,38.13 30.96,37.9 U4.5
  Bottom 0.152: JP1.9 27.76,29.9 27.76,32.46 29.97,34.67 31.24,34.67 | 33.53,37.21 34.54,37.21 35.69,38.35 35.69,40.01 33.43,42.27 33.43,54.05 32.97,54.51 32.94,54.51 U3.12 31.09,54.51 29.72,55.88 v28.6,55.88 27.64,55.88 21.13,49.38 v21.13,44.32 18.03,44.32 v17.65,43.94 | 33.53,37.21 32.13,37.21 v31.77,37.57 | 31.24,34.67 31.88,34.67 33.53,36.32 33.53,37.21 | v31.24,35.41 31.24,34.67
1.8V1  (via drill 0.33)
  Top 0.152: v62.76,37.57 62.18,38.15 | U8.6 62.03,38.3 62.18,38.15 | U7.5 52.4,44.05 v52.12,44.32 52,44.2 U7.6 | C6.2 62.46,35.18 v62.23,35.41 | C8.2 v48.64,43.94 | v59.59,55.88 60.71,55.88 62.08,54.51 U6.12 | 62.18,38.15 62.18,38.13 61.95,37.9 U8.5
  Bottom 0.152: JP3.9 58.75,29.9 58.75,32.46 60.96,34.67 62.23,34.67 | 64.52,37.21 65.53,37.21 66.67,38.35 66.67,40.01 64.41,42.27 64.41,54.05 63.96,54.51 63.93,54.51 U6.12 62.08,54.51 60.71,55.88 v59.59,55.88 58.62,55.88 52.12,49.38 v52.12,44.32 49.02,44.32 v48.64,43.94 | 64.52,37.21 63.12,37.21 v62.76,37.57 | 62.23,34.67 62.87,34.67 64.52,36.32 64.52,37.21 | v62.23,35.41 62.23,34.67
1.8V2  (via drill 0.33)
  Top 0.152: v93.75,37.57 93.17,38.15 | U12.6 93.02,38.3 93.17,38.15 | U11.5 83.39,44.05 v83.11,44.32 82.98,44.2 U11.6 | C11.2 93.45,35.18 v93.22,35.41 | C13.2 v79.63,43.94 | v90.58,55.88 91.69,55.88 93.07,54.51 U10.12 | 93.17,38.15 93.17,38.13 92.94,37.9 U12.5
  Bottom 0.152: JP5.9 89.74,29.9 89.74,32.46 91.95,34.67 93.22,34.67 | 95.5,37.21 96.52,37.21 97.66,38.35 97.66,40.01 95.4,42.27 95.4,54.05 94.94,54.51 94.92,54.51 U10.12 93.07,54.51 91.69,55.88 v90.58,55.88 89.61,55.88 83.11,49.38 v83.11,44.32 80.01,44.32 v79.63,43.94 | 95.5,37.21 94.11,37.21 v93.75,37.57 | 93.22,34.67 93.85,34.67 95.5,36.32 95.5,37.21 | v93.22,35.41 93.22,34.67
1.8V3  (via drill 0.33)
  Top 0.152: v124.74,37.57 124.15,38.15 | U16.6 124.01,38.3 124.15,38.15 | U15.5 114.37,44.05 v114.1,44.32 113.97,44.2 U15.6 | C16.2 124.44,35.18 v124.21,35.41 | C18.2 v110.62,43.94 | v121.56,55.88 122.68,55.88 124.05,54.51 U14.12 | 124.15,38.15 124.15,38.13 123.93,37.9 U16.5
  Bottom 0.152: JP7.9 120.73,29.9 120.73,32.46 122.94,34.67 124.21,34.67 | 126.49,37.21 127.51,37.21 128.65,38.35 128.65,40.01 126.39,42.27 126.39,54.05 125.93,54.51 125.91,54.51 U14.12 124.05,54.51 122.68,55.88 v121.56,55.88 120.6,55.88 114.1,49.38 v114.1,44.32 111,44.32 v110.62,43.94 | 126.49,37.21 125.09,37.21 v124.74,37.57 | 124.21,34.67 124.84,34.67 126.49,36.32 126.49,37.21 | v124.21,35.41 124.21,34.67
1.8V4  (via drill 0.33)
  Top 0.152: v155.73,37.57 155.14,38.15 | U20.6 154.99,38.3 155.14,38.15 | U19.5 145.36,44.05 v145.09,44.32 144.96,44.2 U19.6 | C21.2 155.42,35.18 v155.19,35.41 | C23.2 v141.6,43.94 | v152.55,55.88 153.67,55.88 155.04,54.51 U18.12 | 155.14,38.15 155.14,38.13 154.91,37.9 U20.5
  Bottom 0.152: JP9.9 151.71,29.9 151.71,32.46 153.92,34.67 155.19,34.67 | 157.48,37.21 158.5,37.21 159.64,38.35 159.64,40.01 157.38,42.27 157.38,54.05 156.92,54.51 156.9,54.51 U18.12 155.04,54.51 153.67,55.88 v152.55,55.88 151.59,55.88 145.09,49.38 v145.09,44.32 141.99,44.32 v141.6,43.94 | 157.48,37.21 156.08,37.21 v155.73,37.57 | 155.19,34.67 155.83,34.67 157.48,36.32 157.48,37.21 | v155.19,35.41 155.19,34.67
3.3V  (via drill 0.33)
  Top 0.152: C2.2 13.41,42.58 SJ1.3 13.41,45.92 24.08,56.59 v29.52,56.59 30.8,55.31 | 30.8,55.31 31.2,54.91 U3.10 | U3.8 30.8,55.31 | U3.8
  Top 0.254: SJ1.3 13.34,44.4
  Bottom 0.152: v29.52,56.59 30.8,55.31 | U3.10 | U3.10 31.2,54.91 30.8,55.31 | 30.8,55.31 U3.8 33.59,55.31 33.91,54.99 | U3.10 | U3.10 33.45,54.91 33.66,55.12
  Bottom 0.254: JP1.10 29.21,33.27 30.23,34.29 32.26,34.29 36.07,38.1 36.07,40.13 33.91,42.29 33.91,54.99
3.3V1  (via drill 0.33)
  Top 0.152: C7.2 44.4,42.58 SJ2.3 44.4,45.92 55.07,56.59 v60.5,56.59 61.79,55.31 | 61.79,55.31 62.19,54.91 U6.10 | U6.8 61.79,55.31 | U6.8
  Top 0.254: SJ2.3 44.32,44.4
  Bottom 0.152: v60.5,56.59 61.79,55.31 | U6.10 | U6.10 62.19,54.91 61.79,55.31 | 61.79,55.31 U6.8 64.58,55.31 64.9,54.99 | U6.10 | U6.10 64.43,54.91 64.64,55.12
  Bottom 0.254: JP3.10 60.2,33.27 61.21,34.29 63.25,34.29 67.06,38.1 67.06,40.13 64.9,42.29 64.9,54.99
3.3V2  (via drill 0.33)
  Top 0.152: C12.2 75.39,42.58 SJ3.3 75.39,45.92 86.06,56.59 v91.49,56.59 92.77,55.31 | 92.77,55.31 93.17,54.91 U10.10 | U10.8 92.77,55.31 | U10.8
  Top 0.254: SJ3.3 75.31,44.4
  Bottom 0.152: v91.49,56.59 92.77,55.31 | U10.10 | U10.10 93.17,54.91 92.77,55.31 | 92.77,55.31 U10.8 95.57,55.31 95.89,54.99 | U10.10 | U10.10 95.42,54.91 95.63,55.12
  Bottom 0.254: JP5.10 91.19,33.27 92.2,34.29 94.23,34.29 98.04,38.1 98.04,40.13 95.89,42.29 95.89,54.99
3.3V3  (via drill 0.33)
  Top 0.152: C17.2 106.38,42.58 SJ4.3 106.38,45.92 117.04,56.59 v122.48,56.59 123.76,55.31 | 123.76,55.31 124.16,54.91 U14.10 | U14.8 123.76,55.31 | U14.8
  Top 0.254: SJ4.3 106.3,44.4
  Bottom 0.152: v122.48,56.59 123.76,55.31 | U14.10 | U14.10 124.16,54.91 123.76,55.31 | 123.76,55.31 U14.8 126.56,55.31 126.87,54.99 | U14.10 | U14.10 126.41,54.91 126.62,55.12
  Bottom 0.254: JP7.10 122.17,33.27 123.19,34.29 125.22,34.29 129.03,38.1 129.03,40.13 126.87,42.29 126.87,54.99
3.3V4  (via drill 0.33)
  Top 0.152: C22.2 137.36,42.58 SJ5.3 137.36,45.92 148.03,56.59 v153.47,56.59 154.75,55.31 | 154.75,55.31 155.15,54.91 U18.10 | U18.8 154.75,55.31 | U18.8
  Top 0.254: SJ5.3 137.29,44.4
  Bottom 0.152: v153.47,56.59 154.75,55.31 | U18.10 | U18.10 155.15,54.91 154.75,55.31 | 154.75,55.31 U18.8 157.54,55.31 157.86,54.99 | U18.10 | U18.10 157.4,54.91 157.61,55.12
  Bottom 0.254: JP9.10 153.16,33.27 154.18,34.29 156.21,34.29 160.02,38.1 160.02,40.13 157.86,42.29 157.86,54.99
DCIN  (via drill 0.33)
  Top 0.152: v29.39,54.91 30.23,54.91 31.03,54.11 U3.14
  Bottom 0.152: U3.14 31.03,54.11 30.23,54.91 v29.39,54.91
DCIN1  (via drill 0.33)
  Top 0.152: v60.38,54.91 61.21,54.91 62.02,54.11 U6.14
  Bottom 0.152: U6.14 62.02,54.11 61.21,54.91 v60.38,54.91
DCIN2  (via drill 0.33)
  Top 0.152: v91.36,54.91 92.2,54.91 93.01,54.11 U10.14
  Bottom 0.152: U10.14 93.01,54.11 92.2,54.91 v91.36,54.91
DCIN3  (via drill 0.33)
  Top 0.152: v122.35,54.91 123.19,54.91 124,54.11 U14.14
  Bottom 0.152: U14.14 124,54.11 123.19,54.91 v122.35,54.91
DCIN4  (via drill 0.33)
  Top 0.152: v153.34,54.91 154.18,54.91 154.99,54.11 U18.14
  Bottom 0.152: U18.14 154.99,54.11 154.18,54.91 v153.34,54.91
FAULT  (via drill 0.33)
  Top 0.152: U3.19 35.64,52.91 35.81,53.09 36.63,53.09 36.93,53.39 37.44,53.39 v38.1,54.05
  Bottom 0.152: v38.1,54.05 37.44,53.39 36.93,53.39 36.63,53.09 35.81,53.09 35.64,52.91 U3.19
FAULT1  (via drill 0.33)
  Top 0.152: U6.19 66.62,52.91 66.8,53.09 67.61,53.09 67.92,53.39 68.43,53.39 v69.09,54.05
  Bottom 0.152: v69.09,54.05 68.43,53.39 67.92,53.39 67.61,53.09 66.8,53.09 66.62,52.91 U6.19
FAULT2  (via drill 0.33)
  Top 0.152: U10.19 97.61,52.91 97.79,53.09 98.6,53.09 98.91,53.39 99.42,53.39 v100.08,54.05
  Bottom 0.152: v100.08,54.05 99.42,53.39 98.91,53.39 98.6,53.09 97.79,53.09 97.61,52.91 U10.19
FAULT3  (via drill 0.33)
  Top 0.152: U14.19 128.6,52.91 128.78,53.09 129.59,53.09 129.9,53.39 130.4,53.39 v131.06,54.05
  Bottom 0.152: v131.06,54.05 130.4,53.39 129.9,53.39 129.59,53.09 128.78,53.09 128.6,52.91 U14.19
FAULT4  (via drill 0.33)
  Top 0.152: U18.19 159.59,52.91 159.77,53.09 160.58,53.09 160.88,53.39 161.39,53.39 v162.05,54.05
  Bottom 0.152: v162.05,54.05 161.39,53.39 160.88,53.39 160.58,53.09 159.77,53.09 159.59,52.91 U18.19
FW_RCVR  (via drill 0.33)
  Top 0.152: v35.38,41.83 35.79,42.24 35.79,42.77 35.65,42.91 U3.69
  Bottom 0.152: U3.69 35.65,42.91 35.79,42.77 35.79,42.24 v35.38,41.83
FW_RCVR1  (via drill 0.33)
  Top 0.152: v66.37,41.83 66.78,42.24 66.78,42.77 66.64,42.91 U6.69
  Bottom 0.152: U6.69 66.64,42.91 66.78,42.77 66.78,42.24 v66.37,41.83
FW_RCVR2  (via drill 0.33)
  Top 0.152: v97.36,41.83 97.77,42.24 97.77,42.77 97.63,42.91 U10.69
  Bottom 0.152: U10.69 97.63,42.91 97.77,42.77 97.77,42.24 v97.36,41.83
FW_RCVR3  (via drill 0.33)
  Top 0.152: v128.35,41.83 128.75,42.24 128.75,42.77 128.62,42.91 U14.69
  Bottom 0.152: U14.69 128.62,42.91 128.75,42.77 128.75,42.24 v128.35,41.83
FW_RCVR4  (via drill 0.33)
  Top 0.152: v159.33,41.83 159.74,42.24 159.74,42.77 159.61,42.91 U18.69
  Bottom 0.152: U18.69 159.61,42.91 159.74,42.77 159.74,42.24 v159.33,41.83
GND  (via drill 0.33)
  Top 0.152: U3.1 34.04,56.51 34.04,56.52 | 35.69,56.64 35.56,56.52 34.8,56.52 | 34.12,55.71 U3.5 | U3.5 35.9,55.71 | U3.9 33.87,54.91 33.78,54.99 33.78,54.61 | 33.78,54.61 33.88,54.51 U3.11 35.79,54.51 | U3.13 33.9,54.11 33.78,54.23 | 33.78,54.23 33.78,54.61 | U3.15 33.92,53.71 33.78,53.85 33.78,54.23 | U3.9 35.64,54.91 | U3.5 | U3.9 | 35.67,53.71 34.05,53.71 33.91,53.85 | U3.13 34.04,54.11 34.04,54.1 | U3.13 36.06,54.11 36.07,54.1 | U3.13 35.94,54.11 35.94,54.1
  Bottom 0.152: 34.04,56.52 34.04,56.51 U3.1 35.55,56.51 35.69,56.64 | 34.04,55.63 34.12,55.71 U3.5 35.9,55.71 35.94,55.75 | U3.15 35.67,53.71 35.94,53.98 | 35.94,53.98 v36.02,54.05 35.81,54.25 35.81,54.48 | U3.9 35.64,54.91 | 35.64,54.91 35.81,54.74 35.81,54.48 | U3.11 35.79,54.51 35.81,54.48 | 35.81,54.11 36.06,54.11 | U3.13 34.8,54.11 34.8,54.1 34.8,54.11 | 34.5,54.91 35.64,54.91 | 35.64,54.91 | U3.13 35.81,54.11 | 35.81,54.11 35.94,53.98 | U3.13
  other vias: 37.26,55.7 27.81,35.31 35.31,34.54 26.54,41.15 25.65,44.45 17.65,39.75 15.88,39.5 19.18,36.83 33.58,56.08 13.21,39.24
  pour Bottom (isolate 0.152, rank 6): 39.37,76.2 39.37,35.31 arc-90 37.59,33.53 30.48,33.53 30.48,6.86 17.78,6.86 17.78,33.53 10.67,33.53 arc-90 8.89,35.31 8.89,76.2 arc-90 10.67,77.98 37.59,77.98 arc-90
  pour Top (isolate 0.152, rank 6): 39.37,35.26 arc-90 37.64,33.53 30.48,33.53 30.48,6.86 17.78,6.86 17.78,33.53 10.67,33.53 arc-90 8.89,35.31 8.89,76.2 arc-90 10.67,77.98 37.59,77.98 arc-90 39.37,76.2
GND1  (via drill 0.33)
  Top 0.152: U6.1 65.03,56.51 65.02,56.52 | 66.67,56.64 66.55,56.52 65.79,56.52 | 65.11,55.71 U6.5 | U6.5 66.88,55.71 | U6.9 64.85,54.91 64.77,54.99 64.77,54.61 | 64.77,54.61 64.87,54.51 U6.11 66.78,54.51 | U6.13 64.89,54.11 64.77,54.23 | 64.77,54.23 64.77,54.61 | U6.15 64.91,53.71 64.77,53.85 64.77,54.23 | U6.9 66.63,54.91 | U6.5 | U6.9 | 66.66,53.71 65.04,53.71 64.9,53.85 | U6.13 65.03,54.11 65.02,54.1 | U6.13 67.05,54.11 67.06,54.1 | U6.13 66.92,54.11 66.93,54.1
  Bottom 0.152: 65.02,56.52 65.03,56.51 U6.1 66.54,56.51 66.67,56.64 | 65.02,55.63 65.11,55.71 U6.5 66.88,55.71 66.93,55.75 | U6.15 66.66,53.71 66.93,53.98 | 66.93,53.98 v67,54.05 66.8,54.25 66.8,54.48 | U6.9 66.63,54.91 | 66.63,54.91 66.8,54.74 66.8,54.48 | U6.11 66.78,54.51 66.8,54.48 | 66.8,54.11 67.05,54.11 | U6.13 65.79,54.11 65.79,54.1 65.79,54.11 | 65.49,54.91 66.63,54.91 | 66.63,54.91 | U6.13 66.8,54.11 | 66.8,54.11 66.93,53.98 | U6.13
  other vias: 68.25,55.7 58.8,35.31 66.29,34.54 57.53,41.15 56.64,44.45 48.64,39.75 46.86,39.5 50.16,36.83 64.57,56.08 44.2,39.24
  pour Bottom (isolate 0.152, rank 6): 70.36,76.2 70.36,35.31 arc-90 68.58,33.53 61.47,33.53 61.47,6.86 48.77,6.86 48.77,33.53 41.66,33.53 arc-90 39.88,35.31 39.88,76.2 arc-90 41.66,77.98 68.58,77.98 arc-90
  pour Top (isolate 0.152, rank 6): 70.36,35.26 arc-90 68.63,33.53 61.47,33.53 61.47,6.86 48.77,6.86 48.77,33.53 41.66,33.53 arc-90 39.88,35.31 39.88,76.2 arc-90 41.66,77.98 68.58,77.98 arc-90 70.36,76.2
GND2  (via drill 0.33)
  Top 0.152: U10.1 96.02,56.51 96.01,56.52 | 97.66,56.64 97.54,56.52 96.77,56.52 | 96.09,55.71 U10.5 | U10.5 97.87,55.71 | U10.9 95.84,54.91 95.76,54.99 95.76,54.61 | 95.76,54.61 95.86,54.51 U10.11 97.77,54.51 | U10.13 95.88,54.11 95.76,54.23 | 95.76,54.23 95.76,54.61 | U10.15 95.9,53.71 95.76,53.85 95.76,54.23 | U10.9 97.62,54.91 | U10.5 | U10.9 | 97.65,53.71 96.03,53.71 95.89,53.85 | U10.13 96.02,54.11 96.01,54.1 | U10.13 98.04,54.11 98.04,54.1 | U10.13 97.91,54.11 97.92,54.1
  Bottom 0.152: 96.01,56.52 96.02,56.51 U10.1 97.53,56.51 97.66,56.64 | 96.01,55.63 96.09,55.71 U10.5 97.87,55.71 97.92,55.75 | U10.15 97.65,53.71 97.92,53.98 | 97.92,53.98 v97.99,54.05 97.79,54.25 97.79,54.48 | U10.9 97.62,54.91 | 97.62,54.91 97.79,54.74 97.79,54.48 | U10.11 97.77,54.51 97.79,54.48 | 97.78,54.11 98.04,54.11 | U10.13 96.78,54.11 96.77,54.1 96.77,54.11 | 96.48,54.91 97.62,54.91 | 97.62,54.91 | U10.13 97.78,54.11 | 97.78,54.11 97.92,53.98 | U10.13
  other vias: 99.24,55.7 89.79,35.31 97.28,34.54 88.52,41.15 87.63,44.45 79.63,39.75 77.85,39.5 81.15,36.83 95.55,56.08 75.18,39.24
  pour Bottom (isolate 0.152, rank 6): 101.35,76.2 101.35,35.31 arc-90 99.57,33.53 92.46,33.53 92.46,6.86 79.76,6.86 79.76,33.53 72.64,33.53 arc-90 70.87,35.31 70.87,76.2 arc-90 72.64,77.98 99.57,77.98 arc-90
  pour Top (isolate 0.152, rank 6): 101.35,35.26 arc-90 99.62,33.53 92.46,33.53 92.46,6.86 79.76,6.86 79.76,33.53 72.64,33.53 arc-90 70.87,35.31 70.87,76.2 arc-90 72.64,77.98 99.57,77.98 arc-90 101.35,76.2
GND3  (via drill 0.33)
  Top 0.152: U14.1 127.01,56.51 127,56.52 | 128.65,56.64 128.52,56.52 127.76,56.52 | 127.08,55.71 U14.5 | U14.5 128.86,55.71 | U14.9 126.83,54.91 126.75,54.99 126.75,54.61 | 126.75,54.61 126.85,54.51 U14.11 128.75,54.51 | U14.13 126.87,54.11 126.75,54.23 | 126.75,54.23 126.75,54.61 | U14.15 126.89,53.71 126.75,53.85 126.75,54.23 | U14.9 128.61,54.91 | U14.5 | U14.9 | 128.64,53.71 127.01,53.71 126.87,53.85 | U14.13 127.01,54.11 127,54.1 | U14.13 129.03,54.11 129.03,54.1 | U14.13 128.9,54.11 128.91,54.1
  Bottom 0.152: 127,56.52 127.01,56.51 U14.1 128.52,56.51 128.65,56.64 | 127,55.63 127.08,55.71 U14.5 128.86,55.71 128.91,55.75 | U14.15 128.64,53.71 128.91,53.98 | 128.91,53.98 v128.98,54.05 128.78,54.25 128.78,54.48 | U14.9 128.61,54.91 | 128.61,54.91 128.78,54.74 128.78,54.48 | U14.11 128.75,54.51 128.78,54.48 | 128.77,54.11 129.03,54.11 | U14.13 127.77,54.11 127.76,54.1 127.76,54.11 | 127.46,54.91 128.61,54.91 | 128.61,54.91 | U14.13 128.77,54.11 | 128.77,54.11 128.91,53.98 | U14.13
  other vias: 130.23,55.7 120.78,35.31 128.27,34.54 119.51,41.15 118.62,44.45 110.62,39.75 108.84,39.5 112.14,36.83 126.54,56.08 106.17,39.24
  pour Bottom (isolate 0.152, rank 6): 132.33,76.2 132.33,35.31 arc-90 130.56,33.53 123.44,33.53 123.44,6.86 110.74,6.86 110.74,33.53 103.63,33.53 arc-90 101.85,35.31 101.85,76.2 arc-90 103.63,77.98 130.56,77.98 arc-90
  pour Top (isolate 0.152, rank 6): 132.33,35.26 arc-90 130.61,33.53 123.44,33.53 123.44,6.86 110.74,6.86 110.74,33.53 103.63,33.53 arc-90 101.85,35.31 101.85,76.2 arc-90 103.63,77.98 130.56,77.98 arc-90 132.33,76.2
GND4  (via drill 0.33)
  Top 0.152: U18.1 158,56.51 157.99,56.52 | 159.64,56.64 159.51,56.52 158.75,56.52 | 158.07,55.71 U18.5 | U18.5 159.85,55.71 | U18.9 157.82,54.91 157.73,54.99 157.73,54.61 | 157.73,54.61 157.84,54.51 U18.11 159.74,54.51 | U18.13 157.85,54.11 157.73,54.23 | 157.73,54.23 157.73,54.61 | U18.15 157.87,53.71 157.73,53.85 157.73,54.23 | U18.9 159.59,54.91 | U18.5 | U18.9 | 159.63,53.71 158,53.71 157.86,53.85 | U18.13 157.99,54.11 157.99,54.1 | U18.13 160.01,54.11 160.02,54.1 | U18.13 159.89,54.11 159.89,54.1
  Bottom 0.152: 157.99,56.52 158,56.51 U18.1 159.5,56.51 159.64,56.64 | 157.99,55.63 158.07,55.71 U18.5 159.85,55.71 159.89,55.75 | U18.15 159.63,53.71 159.89,53.98 | 159.89,53.98 v159.97,54.05 159.77,54.25 159.77,54.48 | U18.9 159.59,54.91 | 159.59,54.91 159.77,54.74 159.77,54.48 | U18.11 159.74,54.51 159.77,54.48 | 159.76,54.11 160.01,54.11 | U18.13 158.76,54.11 158.75,54.1 158.75,54.11 | 158.45,54.91 159.59,54.91 | 159.59,54.91 | U18.13 159.76,54.11 | 159.76,54.11 159.89,53.98 | U18.13
  other vias: 161.21,55.7 151.76,35.31 159.26,34.54 150.5,41.15 149.61,44.45 141.6,39.75 139.83,39.5 143.13,36.83 157.53,56.08 137.16,39.24
  pour Bottom (isolate 0.152, rank 6): 163.32,76.2 163.32,35.31 arc-90 161.54,33.53 154.43,33.53 154.43,6.86 141.73,6.86 141.73,33.53 134.62,33.53 arc-90 132.84,35.31 132.84,76.2 arc-90 134.62,77.98 161.54,77.98 arc-90
  pour Top (isolate 0.152, rank 6): 163.32,35.26 arc-90 161.59,33.53 154.43,33.53 154.43,6.86 141.73,6.86 141.73,33.53 134.62,33.53 arc-90 132.84,35.31 132.84,76.2 arc-90 134.62,77.98 161.54,77.98 arc-90 163.32,76.2
GP1  (via drill 0.33)
  Top 0.152: U6.48 63.19,47.3 61.62,47.3 61.52,47.19 60.73,47.19 60.53,47.4 59,47.4 v58.17,46.56 56.97,46.56 54,43.58 U7.1
  Bottom 0.152: v58.17,46.56 59,47.4 60.53,47.4 60.73,47.19 61.52,47.19 61.62,47.3 63.19,47.3 arc90 U6.48
GP2  (via drill 0.33)
  Top 0.152: U6.42 62.24,48.51 v62.05,48.69 61.8,48.95 59.74,48.95 58.62,47.83 57.76,47.83 53.6,43.67 U7.2
  Bottom 0.152: v62.05,48.69 62.24,48.51 U6.42
GP3  (via drill 0.33)
  Top 0.152: U6.34 62.1,50.11 61.57,49.58 v58.98,49.58 58.42,49.58 53.2,44.36 U7.3
  Bottom 0.152: U6.34 62.1,50.11 61.57,49.58 v58.98,49.58
GP4  (via drill 0.33)
  Top 0.152: U6.32 61.56,50.51 v61.29,50.24 61.21,50.16 60.2,50.16 60.02,50.34 58.75,50.34 52.8,44.39 U7.4
  Bottom 0.152: U6.32 61.56,50.51 v61.29,50.24
GP5  (via drill 0.33)
  Top 0.152: U6.30 62.31,50.91 62.31,50.9 60.55,50.9 v60.48,50.83 60.43,50.77 57.58,50.77 51.44,44.63 51.44,44.04 51.6,43.88 U7.7
  Bottom 0.152: v60.48,50.83 60.55,50.9 62.31,50.9 62.31,50.91 U6.30
GP6  (via drill 0.33)
  Top 0.152: U6.28 62.28,51.31 62.18,51.21 61.04,51.21 60.73,51.51 59.74,51.51 v59.69,51.46 59.38,51.16 57.51,51.16 51.1,44.76 51.1,43.92 51.2,43.82 U7.8
  Bottom 0.152: v59.69,51.46 59.74,51.51 60.73,51.51 61.04,51.21 62.18,51.21 62.28,51.31 U6.28
GP7  (via drill 0.33)
  Top 0.152: U6.26 62.25,51.71 62.05,51.51 61.16,51.51 60.86,51.82 60.27,51.82 v59.61,52.48 58.37,52.48 50.77,44.88 50.77,43.76 50.8,43.74 U7.9
  Bottom 0.152: U6.26 62.25,51.71 62.05,51.51 61.16,51.51 60.86,51.82 60.27,51.82 v59.61,52.48
GP8  (via drill 0.33)
  Top 0.152: v67.36,51.82 67.25,51.71 U6.25
  Bottom 0.152: U6.25 67.25,51.71 v67.36,51.82
GP9  (via drill 0.33)
  Top 0.152: U6.24 62.22,52.11 61.92,51.82 61.29,51.82 v60.63,52.48 59.97,53.14 58.57,53.14 50.4,44.96 U7.10
  Bottom 0.152: v60.63,52.48 61.29,51.82 61.92,51.82 62.22,52.11 U6.24
GP10  (via drill 0.33)
  Top 0.152: U10.48 94.17,47.3 92.61,47.3 92.51,47.19 91.72,47.19 91.52,47.4 89.99,47.4 v89.15,46.56 87.96,46.56 84.98,43.58 U11.1
  Bottom 0.152: v89.15,46.56 89.99,47.4 91.52,47.4 91.72,47.19 92.51,47.19 92.61,47.3 94.17,47.3 arc90 U10.48
GP11  (via drill 0.33)
  Top 0.152: U10.42 93.22,48.51 v93.04,48.69 92.79,48.95 90.73,48.95 89.61,47.83 88.75,47.83 84.58,43.67 U11.2
  Bottom 0.152: v93.04,48.69 93.22,48.51 U10.42
GP12  (via drill 0.33)
  Top 0.152: U10.34 93.08,50.11 92.56,49.58 v89.97,49.58 89.41,49.58 84.19,44.36 U11.3
  Bottom 0.152: U10.34 93.08,50.11 92.56,49.58 v89.97,49.58
GP12_PWM0  (via drill 0.33)
  Top 0.152: v36.22,49.89 35.71,49.89 35.53,49.71 U3.35 34.04,49.71 33.43,49.1 33.43,41.81 31.12,39.5 U4.9
  Bottom 0.152: v36.22,49.89 35.71,49.89 35.53,49.71 U3.35 | U3.35
GP12_PWM1  (via drill 0.33)
  Top 0.152: v67.21,49.89 66.7,49.89 66.52,49.71 U6.35 65.02,49.71 64.41,49.1 64.41,41.81 62.11,39.5 U8.9
  Bottom 0.152: v67.21,49.89 66.7,49.89 66.52,49.71 U6.35 | U6.35
GP12_PWM2  (via drill 0.33)
  Top 0.152: v98.2,49.89 97.69,49.89 97.51,49.71 U10.35 96.01,49.71 95.4,49.1 95.4,41.81 93.09,39.5 U12.9
  Bottom 0.152: v98.2,49.89 97.69,49.89 97.51,49.71 U10.35 | U10.35
GP12_PWM3  (via drill 0.33)
  Top 0.152: v129.18,49.89 128.68,49.89 128.5,49.71 U14.35 127,49.71 126.39,49.1 126.39,41.81 124.08,39.5 U16.9
  Bottom 0.152: v129.18,49.89 128.68,49.89 128.5,49.71 U14.35 | U14.35
GP12_PWM4  (via drill 0.33)
  Top 0.152: v160.17,49.89 159.66,49.89 159.49,49.71 U18.35 157.99,49.71 157.38,49.1 157.38,41.81 155.07,39.5 U20.9
  Bottom 0.152: v160.17,49.89 159.66,49.89 159.49,49.71 U18.35 | U18.35
GP13  (via drill 0.33)
  Top 0.152: U10.32 92.55,50.51 v92.28,50.24 92.2,50.16 91.19,50.16 91.01,50.34 89.74,50.34 83.78,44.39 U11.4
  Bottom 0.152: U10.32 92.55,50.51 v92.28,50.24
GP13_PWM1  (via drill 0.33)
  Top 0.152: v38.53,51.1 38.51,51.1 37.82,50.42 37.29,50.42 37.16,50.55 35.94,50.55 35.5,50.11 U3.33 34,50.11 33.12,49.23 33.12,41.94 31.09,39.9 U4.10
  Bottom 0.152: U3.33 35.5,50.11 35.94,50.55 37.16,50.55 37.29,50.42 37.82,50.42 38.51,51.1 v38.53,51.1
GP13_PWM2  (via drill 0.33)
  Top 0.152: v69.52,51.1 69.49,51.1 68.81,50.42 68.28,50.42 68.15,50.55 66.93,50.55 66.49,50.11 U6.33 64.99,50.11 64.11,49.23 64.11,41.94 62.07,39.9 U8.10
  Bottom 0.152: U6.33 66.49,50.11 66.93,50.55 68.15,50.55 68.28,50.42 68.81,50.42 69.49,51.1 v69.52,51.1
GP13_PWM3  (via drill 0.33)
  Top 0.152: v100.51,51.1 100.48,51.1 99.8,50.42 99.26,50.42 99.14,50.55 97.92,50.55 97.48,50.11 U10.33 95.98,50.11 95.1,49.23 95.1,41.94 93.06,39.9 U12.10
  Bottom 0.152: U10.33 97.48,50.11 97.92,50.55 99.14,50.55 99.26,50.42 99.8,50.42 100.48,51.1 v100.51,51.1
GP13_PWM4  (via drill 0.33)
  Top 0.152: v131.5,51.1 131.47,51.1 130.78,50.42 130.25,50.42 130.12,50.55 128.91,50.55 128.47,50.11 U14.33 126.97,50.11 126.09,49.23 126.09,41.94 124.05,39.9 U16.10
  Bottom 0.152: U14.33 128.47,50.11 128.91,50.55 130.12,50.55 130.25,50.42 130.78,50.42 131.47,51.1 v131.5,51.1
GP13_PWM5  (via drill 0.33)
  Top 0.152: v162.48,51.1 162.46,51.1 161.77,50.42 161.24,50.42 161.11,50.55 159.89,50.55 159.46,50.11 U18.33 157.96,50.11 157.07,49.23 157.07,41.94 155.04,39.9 U20.10
  Bottom 0.152: U18.33 159.46,50.11 159.89,50.55 161.11,50.55 161.24,50.42 161.77,50.42 162.46,51.1 v162.48,51.1
GP14  (via drill 0.33)
  Top 0.152: U3.48 32.2,47.3 30.63,47.3 30.53,47.19 29.74,47.19 29.54,47.4 28.02,47.4 v27.18,46.56 25.98,46.56 23.01,43.58 U1.1
  Bottom 0.152: v27.18,46.56 28.02,47.4 29.54,47.4 29.74,47.19 30.53,47.19 30.63,47.3 32.2,47.3 arc90 U3.48
GP15  (via drill 0.33)
  Top 0.152: U3.42 31.25,48.51 v31.06,48.69 30.81,48.95 28.75,48.95 27.64,47.83 26.77,47.83 22.61,43.67 U1.2
  Bottom 0.152: v31.06,48.69 31.25,48.51 U3.42
GP16  (via drill 0.33)
  Top 0.152: U10.30 93.3,50.91 93.29,50.9 91.54,50.9 v91.47,50.83 91.42,50.77 88.57,50.77 82.42,44.63 82.42,44.04 82.58,43.88 U11.7
  Bottom 0.152: v91.47,50.83 91.54,50.9 93.29,50.9 93.3,50.91 U10.30
GP17  (via drill 0.33)
  Top 0.152: U10.28 93.27,51.31 93.17,51.21 92.02,51.21 91.72,51.51 90.73,51.51 v90.68,51.46 90.37,51.16 88.49,51.16 82.09,44.76 82.09,43.92 82.19,43.82 U11.8
  Bottom 0.152: v90.68,51.46 90.73,51.51 91.72,51.51 92.02,51.21 93.17,51.21 93.27,51.31 U10.28
GP18  (via drill 0.33)
  Top 0.152: U10.26 93.24,51.71 93.04,51.51 92.15,51.51 91.85,51.82 91.26,51.82 v90.6,52.48 89.36,52.48 81.76,44.88 81.76,43.76 81.78,43.74 U11.9
  Bottom 0.152: U10.26 93.24,51.71 93.04,51.51 92.15,51.51 91.85,51.82 91.26,51.82 v90.6,52.48
GP19  (via drill 0.33)
  Top 0.152: v98.35,51.82 98.24,51.71 U10.25
  Bottom 0.152: U10.25 98.24,51.71 v98.35,51.82
GP19_I2C_1_SCL  (via drill 0.33)
  Top 0.152: U3.41 35.55,48.51 35.66,48.62 36.75,48.62 36.93,48.79 38.2,48.79 v38.35,48.95
  Bottom 0.152: v38.35,48.95 38.2,48.79 36.93,48.79 36.75,48.62 35.66,48.62 35.55,48.51 U3.41
GP19_I2C_1_SCL1  (via drill 0.33)
  Top 0.152: U6.41 66.54,48.51 66.65,48.62 67.74,48.62 67.92,48.79 69.19,48.79 v69.34,48.95
  Bottom 0.152: v69.34,48.95 69.19,48.79 67.92,48.79 67.74,48.62 66.65,48.62 66.54,48.51 U6.41
GP19_I2C_1_SCL2  (via drill 0.33)
  Top 0.152: U10.41 97.53,48.51 97.64,48.62 98.73,48.62 98.91,48.79 100.18,48.79 v100.33,48.95
  Bottom 0.152: v100.33,48.95 100.18,48.79 98.91,48.79 98.73,48.62 97.64,48.62 97.53,48.51 U10.41
GP19_I2C_1_SCL3  (via drill 0.33)
  Top 0.152: U14.41 128.52,48.51 128.63,48.62 129.72,48.62 129.9,48.79 131.17,48.79 v131.32,48.95
  Bottom 0.152: v131.32,48.95 131.17,48.79 129.9,48.79 129.72,48.62 128.63,48.62 128.52,48.51 U14.41
GP19_I2C_1_SCL4  (via drill 0.33)
  Top 0.152: U18.41 159.51,48.51 159.61,48.62 160.71,48.62 160.88,48.79 162.15,48.79 v162.31,48.95
  Bottom 0.152: v162.31,48.95 162.15,48.79 160.88,48.79 160.71,48.62 159.61,48.62 159.51,48.51 U18.41
GP20  (via drill 0.33)
  Top 0.152: U10.24 93.2,52.11 92.91,51.82 92.28,51.82 v91.62,52.48 90.96,53.14 89.56,53.14 81.39,44.96 U11.10
  Bottom 0.152: v91.62,52.48 92.28,51.82 92.91,51.82 93.2,52.11 U10.24
GP20_I2C_1_SDA  (via drill 0.33)
  Top 0.152: U3.43 36.12,48.11 v36.27,47.95
  Bottom 0.152: v36.27,47.95 36.12,48.11 U3.43 | U3.43
GP20_I2C_1_SDA1  (via drill 0.33)
  Top 0.152: U6.43 67.11,48.11 v67.26,47.95
  Bottom 0.152: v67.26,47.95 67.11,48.11 U6.43 | U6.43
GP20_I2C_1_SDA2  (via drill 0.33)
  Top 0.152: U10.43 98.09,48.11 v98.25,47.95
  Bottom 0.152: v98.25,47.95 98.09,48.11 U10.43 | U10.43
GP20_I2C_1_SDA3  (via drill 0.33)
  Top 0.152: U14.43 129.08,48.11 v129.24,47.95
  Bottom 0.152: v129.24,47.95 129.08,48.11 U14.43 | U14.43
GP20_I2C_1_SDA4  (via drill 0.33)
  Top 0.152: U18.43 160.07,48.11 v160.22,47.95
  Bottom 0.152: v160.22,47.95 160.07,48.11 U18.43 | U18.43
GP21  (via drill 0.33)
  Top 0.152: U14.48 125.16,47.3 123.6,47.3 123.5,47.19 122.71,47.19 122.5,47.4 120.98,47.4 v120.14,46.56 118.95,46.56 115.97,43.58 U15.1
  Bottom 0.152: v120.14,46.56 120.98,47.4 122.5,47.4 122.71,47.19 123.5,47.19 123.6,47.3 125.16,47.3 arc90 U14.48
GP22  (via drill 0.33)
  Top 0.152: U14.42 124.21,48.51 v124.03,48.69 123.77,48.95 121.72,48.95 120.6,47.83 119.74,47.83 115.57,43.67 U15.2
  Bottom 0.152: v124.03,48.69 124.21,48.51 U14.42
GP23  (via drill 0.33)
  Top 0.152: U14.34 124.07,50.11 123.55,49.58 v120.95,49.58 120.4,49.58 115.17,44.36 U15.3
  Bottom 0.152: U14.34 124.07,50.11 123.55,49.58 v120.95,49.58
GP24  (via drill 0.33)
  Top 0.152: U14.32 123.53,50.51 v123.27,50.24 123.19,50.16 122.17,50.16 122,50.34 120.73,50.34 114.77,44.39 U15.4
  Bottom 0.152: U14.32 123.53,50.51 v123.27,50.24
GP25  (via drill 0.33)
  Top 0.152: U14.30 124.29,50.91 124.28,50.9 122.53,50.9 v122.45,50.83 122.4,50.77 119.56,50.77 113.41,44.63 113.41,44.04 113.57,43.88 U15.7
  Bottom 0.152: v122.45,50.83 122.53,50.9 124.28,50.9 124.29,50.91 U14.30
GP26  (via drill 0.33)
  Top 0.152: U14.28 124.26,51.31 124.16,51.21 123.01,51.21 122.71,51.51 121.72,51.51 v121.67,51.46 121.36,51.16 119.48,51.16 113.08,44.76 113.08,43.92 113.17,43.82 U15.8
  Bottom 0.152: v121.67,51.46 121.72,51.51 122.71,51.51 123.01,51.21 124.16,51.21 124.26,51.31 U14.28
GP27  (via drill 0.33)
  Top 0.152: U14.26 124.22,51.71 124.03,51.51 123.14,51.51 122.83,51.82 122.25,51.82 v121.59,52.48 120.34,52.48 112.75,44.88 112.75,43.76 112.77,43.74 U15.9
  Bottom 0.152: U14.26 124.22,51.71 124.03,51.51 123.14,51.51 122.83,51.82 122.25,51.82 v121.59,52.48
GP27_I2C_6_SCL  (via drill 0.33)
  Top 0.152: v37.41,48.13 36.58,47.3 35.99,47.3 35.58,47.71 U3.45
  Bottom 0.152: U3.45 35.58,47.71 35.99,47.3 36.58,47.3 v37.41,48.13
GP27_I2C_6_SCL1  (via drill 0.33)
  Top 0.152: v68.4,48.13 67.56,47.3 66.98,47.3 66.57,47.71 U6.45
  Bottom 0.152: U6.45 66.57,47.71 66.98,47.3 67.56,47.3 v68.4,48.13
GP27_I2C_6_SCL2  (via drill 0.33)
  Top 0.152: v99.39,48.13 98.55,47.3 97.97,47.3 97.56,47.71 U10.45
  Bottom 0.152: U10.45 97.56,47.71 97.97,47.3 98.55,47.3 v99.39,48.13
GP27_I2C_6_SCL3  (via drill 0.33)
  Top 0.152: v130.38,48.13 129.54,47.3 128.96,47.3 128.54,47.71 U14.45
  Bottom 0.152: U14.45 128.54,47.71 128.96,47.3 129.54,47.3 v130.38,48.13
GP27_I2C_6_SCL4  (via drill 0.33)
  Top 0.152: v161.37,48.13 160.53,47.3 159.94,47.3 159.53,47.71 U18.45
  Bottom 0.152: U18.45 159.53,47.71 159.94,47.3 160.53,47.3 v161.37,48.13
GP28  (via drill 0.33)
  Top 0.152: v129.34,51.82 129.23,51.71 U14.25
  Bottom 0.152: U14.25 129.23,51.71 v129.34,51.82
GP28_I2C_6_SDA  (via drill 0.33)
  Top 0.152: U3.47 35.5,47.31 35.81,46.99 36.7,46.99 37.19,47.47 37.92,47.47 v38.41,47.95
  Bottom 0.152: v38.41,47.95 37.92,47.47 37.19,47.47 36.7,46.99 35.81,46.99 35.5,47.31 U3.47
GP28_I2C_6_SDA1  (via drill 0.33)
  Top 0.152: U6.47 66.48,47.31 66.8,46.99 67.69,46.99 68.17,47.47 68.91,47.47 v69.39,47.95
  Bottom 0.152: v69.39,47.95 68.91,47.47 68.17,47.47 67.69,46.99 66.8,46.99 66.48,47.31 U6.47
GP28_I2C_6_SDA2  (via drill 0.33)
  Top 0.152: U10.47 97.47,47.31 97.79,46.99 98.68,46.99 99.16,47.47 99.9,47.47 v100.38,47.95
  Bottom 0.152: v100.38,47.95 99.9,47.47 99.16,47.47 98.68,46.99 97.79,46.99 97.47,47.31 U10.47
GP28_I2C_6_SDA3  (via drill 0.33)
  Top 0.152: U14.47 128.46,47.31 128.78,46.99 129.67,46.99 130.15,47.47 130.89,47.47 v131.37,47.95
  Bottom 0.152: v131.37,47.95 130.89,47.47 130.15,47.47 129.67,46.99 128.78,46.99 128.46,47.31 U14.47
GP28_I2C_6_SDA4  (via drill 0.33)
  Top 0.152: U18.47 159.45,47.31 159.77,46.99 160.66,46.99 161.14,47.47 161.87,47.47 v162.36,47.95
  Bottom 0.152: v162.36,47.95 161.87,47.47 161.14,47.47 160.66,46.99 159.77,46.99 159.45,47.31 U18.47
GP29  (via drill 0.33)
  Top 0.152: U14.24 124.19,52.11 123.9,51.82 123.27,51.82 v122.61,52.48 121.94,53.14 120.55,53.14 112.37,44.96 U15.10
  Bottom 0.152: v122.61,52.48 123.27,51.82 123.9,51.82 124.19,52.11 U14.24
GP30  (via drill 0.33)